# Altium PCB fpga_board.PcbDoc (part 3 of 4)
Units mil, origin at the board's own origin, x right, y up, seen from the top; angles counter-clockwise.
Board outline 3204.72 x 2960.63 mil, 6 copper layers (Top Layer, GND1, SIG, PWR, GND2, Bottom Layer), stack 32.112 mil thick; 192 components, 182 nets, 714 pads, 321 vias.
Unrouted connection lines stored in the file: 11.
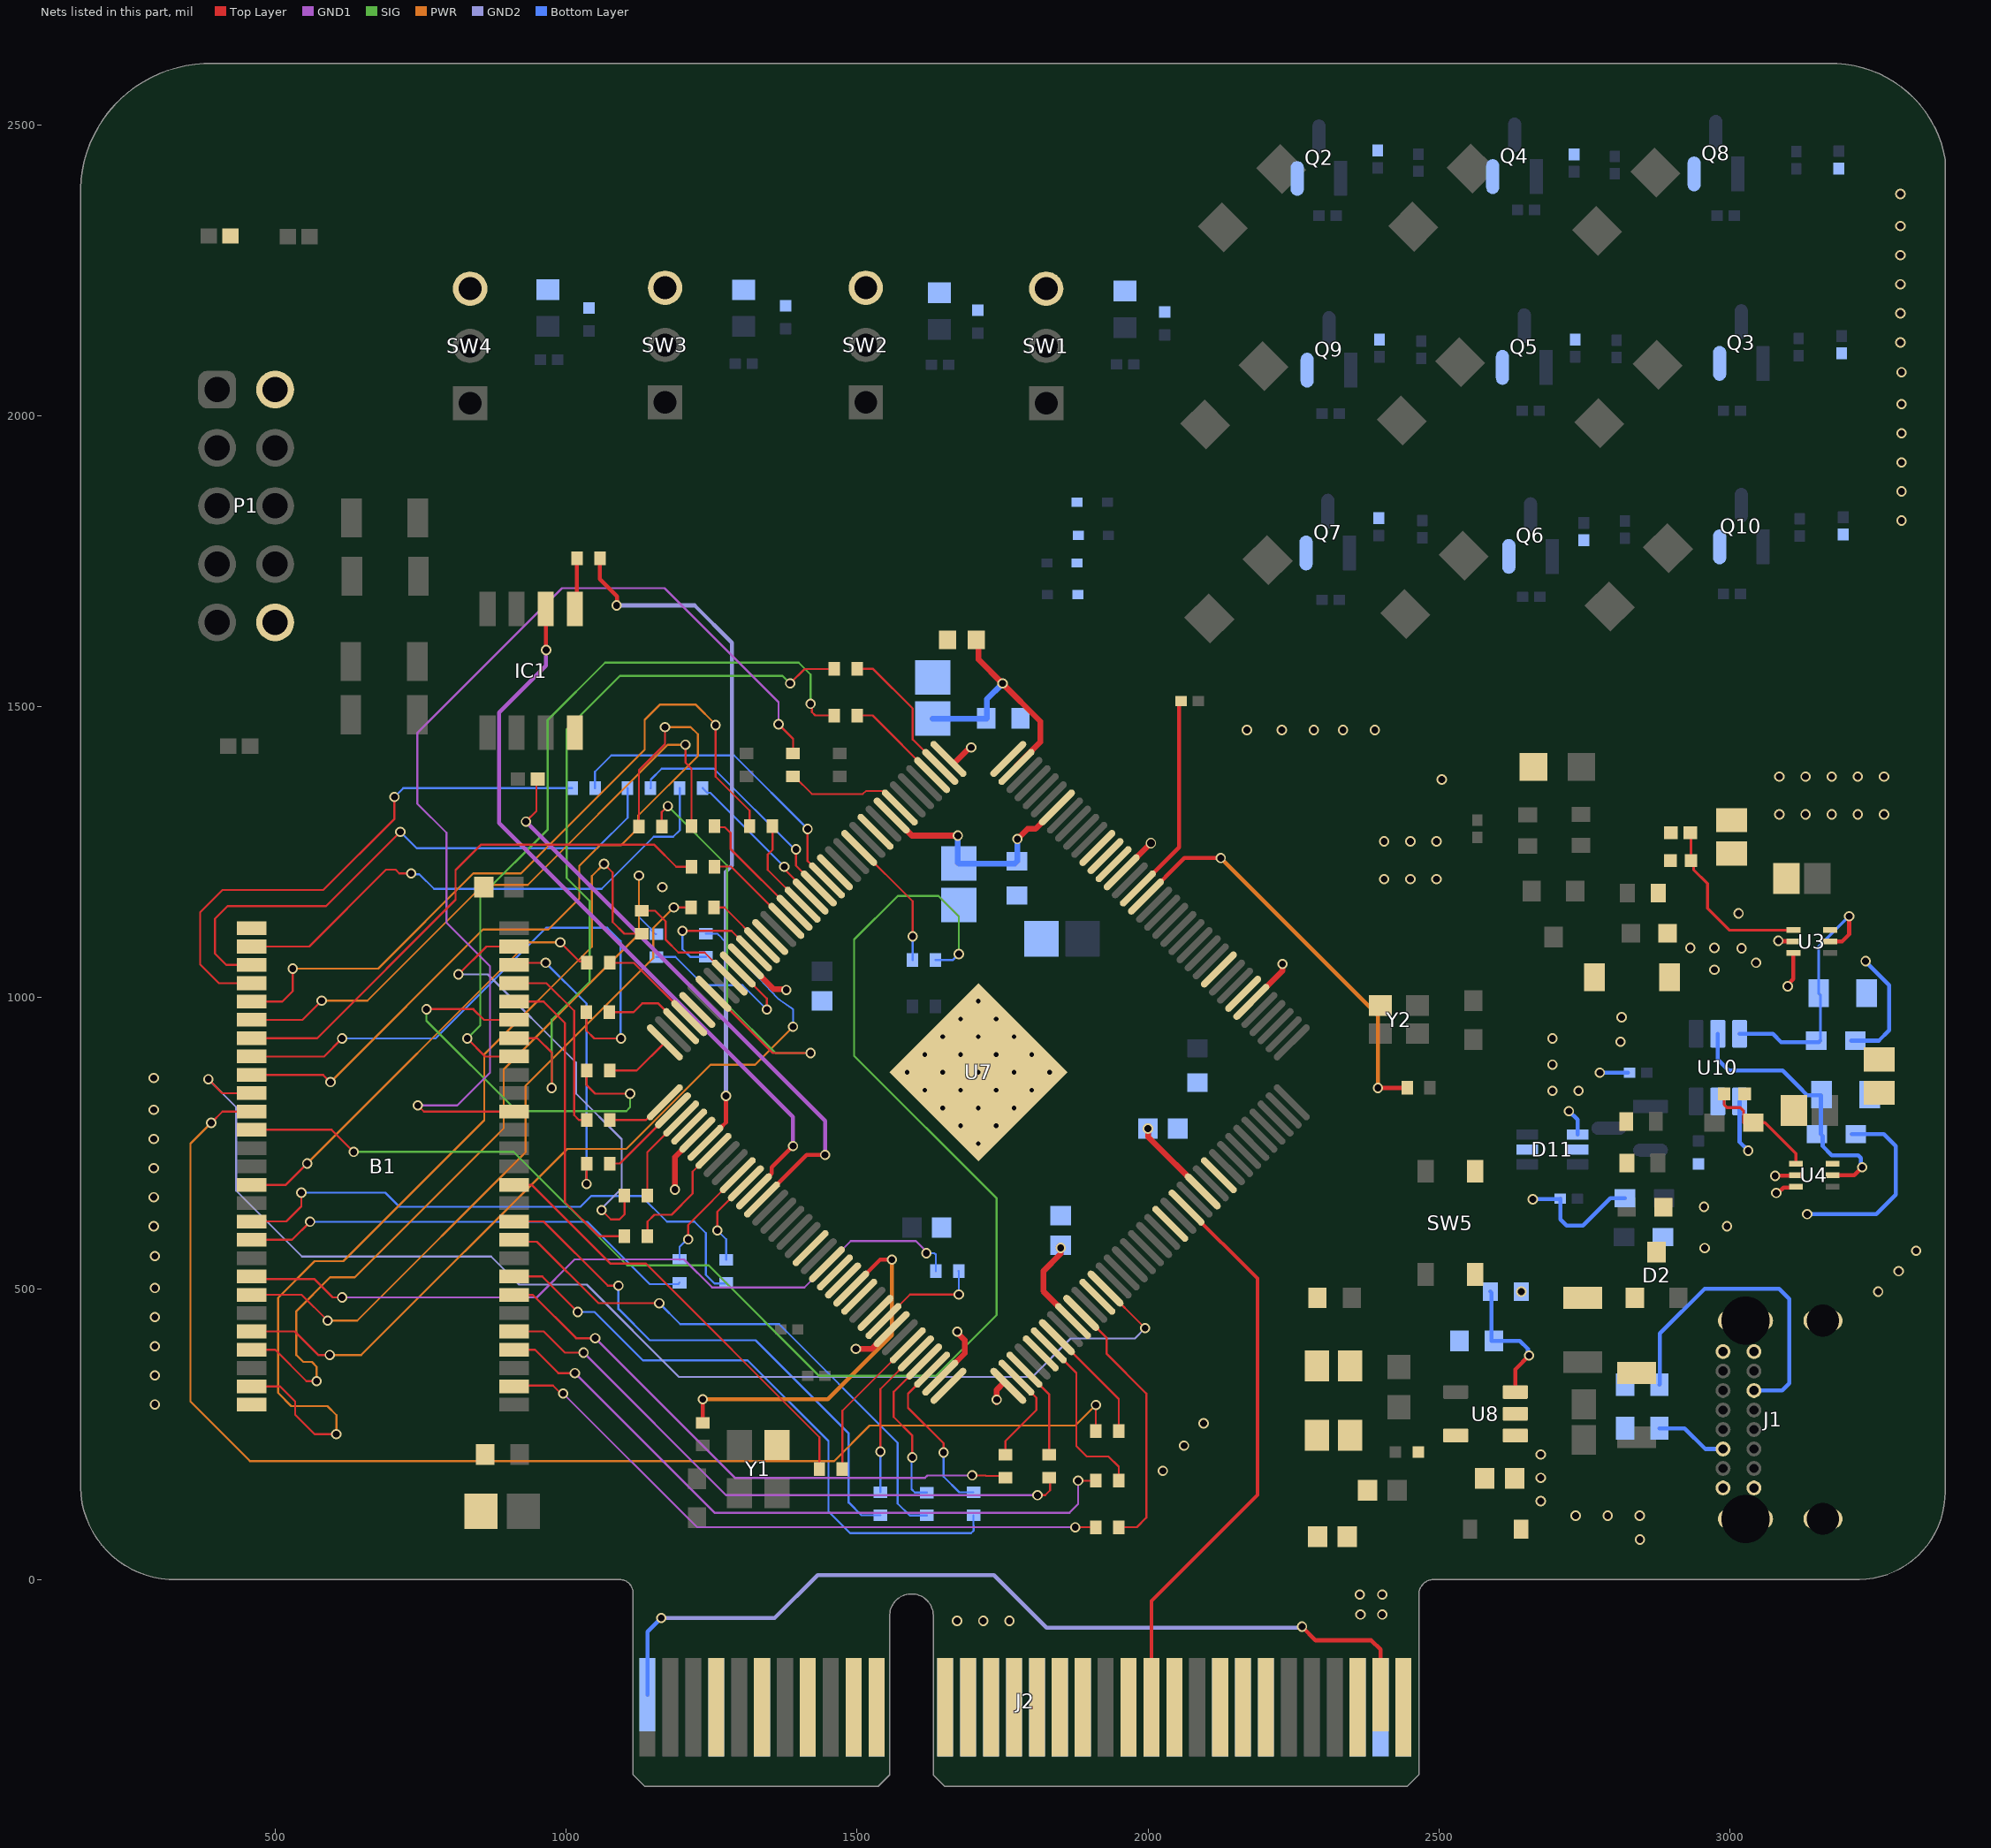
[diagram p6: the nets of this part, all layers, seen from the top]

## Via types
v1: diameter 17.72, hole 11.81, Top Layer to Bottom Layer, 284 vias
v2: diameter 19.68, hole 7.87, Top Layer to Bottom Layer, 25 vias
v3: diameter 17.72, hole 13.78, Top Layer to Bottom Layer, 10 vias
v4: diameter 23.62, hole 17.72, Top Layer to Bottom Layer, 2 vias

## Nets (pads, with @x,y where several pads share a name; then routed paths per layer and width w, separated by ;. In a path a pad name is that pad's centre, name@x,y a point inside that pad or via, vN(x,y) a via of type N, cw(c..) or ccw(c..) an arc to the next point about the centre after c; other vN are vias at no path point) (continued)
"Higher Byte Mask": B1.39 R68.2 | length 2580.7
  Top Layer w3.5: B1.39@459.49,772.99 597.01,772.99 v1(635,735)
  SIG w3.5: v1(635,735) 910,735 1105,540 1245,540 1435,350 1635,350 1740,455 1740,655 1495,900 1495,1100 1570,1175 1640,1175 1675,1140 v1(1675,1075)
  Bottom Layer w3.5: R68.2@1634.68,1065 1665,1065 v1(1675,1075)
"Higher Byte Mask Term": R68.1 U7.120 | length 230.4
  Top Layer w3.5: U7.120@1503.79,1257.34 1595.47,1165.66 v1(1595.47,1105.32)
  Bottom Layer w3.5: R68.1@1595.31,1065 1595.47,1065.16 v1(1595.47,1105.32)
HOT_PLUG: J2.A1 J2.B31 | length 1540.9
  Top Layer w7: v1(2264.76,-80.71) 2288.39,-104.33 2383.86,-104.33 2399.61,-120.08 J2.B31@2399.61,-197.83
  GND2 w7: v1(1163.39,-65.94) 1358.27,-65.94 1432.09,7.87 1735.24,7.87 1825.79,-82.68 2262.8,-82.68 v1(2264.76,-80.71)
  Bottom Layer w7: J2.A1@1139.76,-197.83 1139.76,-89.57 v1(1163.39,-65.94)
INT1: J2.A11 J2.B11
INT2: J2.A15 J2.B15